# Altium PCB 双闪灯.PcbDoc
Units mm, origin at the board's own origin, x right, y up, seen from the top; angles counter-clockwise.
Board outline 152.4 x 101.6 mm, 2 copper layers (Top Layer, Bottom Layer); 11 components, 8 nets, 24 pads, 4 vias.
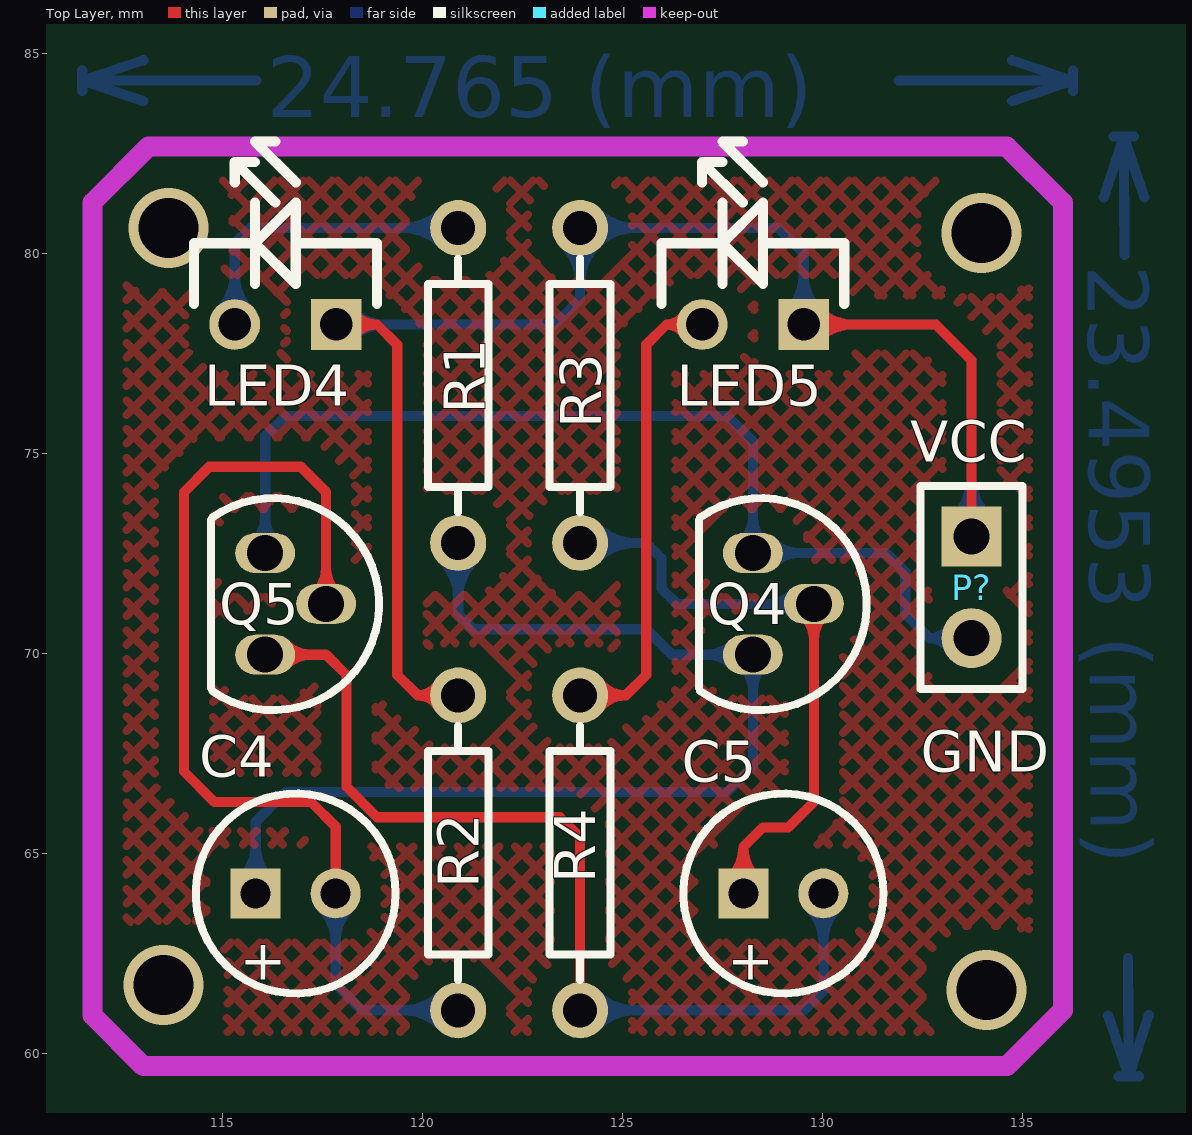
[diagram p0: Top Layer view]
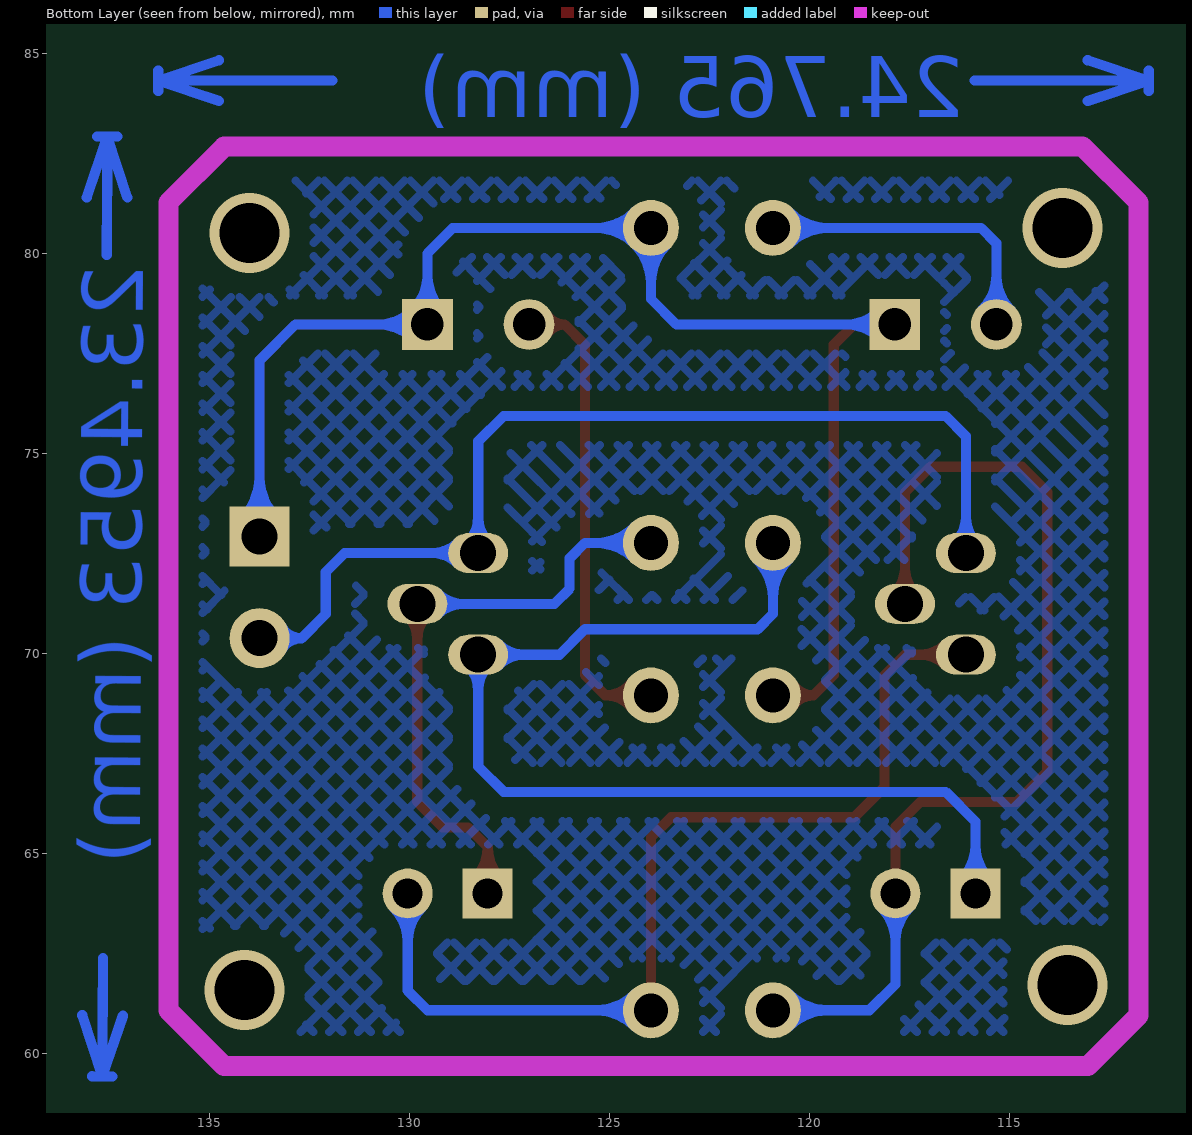
[diagram p1: Bottom Layer view, seen from below]

## Layer stack, top to bottom
Top Layer: signal copper 0.0356
Dielectric: dielectric 0.32, FR-4, Dk 4.8
Bottom Layer: signal copper 0.0356

## Board outline
25.4,25.4 177.8,25.4 177.8,127 25.4,127

## Design rules (kind name [scope] priority, off if disabled: settings)
Clearance [All] p1: gap=0.5
ComponentClearance [All] p1: gap=0.254 collisioncheckmode=3
PolygonConnect [All] p1: connectstyle=Relief reliefconductorwidth=0.254 reliefentries=4 polygonreliefangle="90 Angle"
RoutingVias [All] p1: holewidth=0.711 width=1.27 viastyle="Through Hole" minholewidth=0.711 minwidth=1.27 maxholewidth=0.711 maxwidth=1.27
SolderMaskExpansion [All] p1: expansion=0.102
TestPointUsage [All] p1: valid=0 allowmultiple=FALSE
Testpoint [All] p1: side=15 testpointundercomponent=TRUE minsize=1.016 maxsize=2.54 preferedsize=1.524 minholesize=0 maxholesize=1.016 preferedholesize=0.813 testpointgrid=0.025 style=1023 order=-539222988
Width [All] p1: maxlimit=0.254 minlimit=0.254 preferedwidth=0.254
17 further rules are at their usual default settings.

## Components (designator, comment, footprint, x,y, rotation, side; value= is the part's Value field where it differs from the comment)
C4 "Cap" DJDR_5mm 116.84,64.008 r0 top
C5 "Cap" DJDR_5mm 129.032,64.008 r0 top
LED4 "LED1" LED 115.824,78.74 r0 top
LED5 "LED1" LED 127.508,78.74 r0 top
P? "Header 2" HDR-2 132.588,69.088 r270 top
Q4 "2N3904" SANJG 127,73.66 r180 top
Q5 "2N3904" SANJG 114.808,73.66 r180 top
R1 "Res2" RSE 120.904,76.708 r270 top
R2 "Res2" RSE 120.904,65.024 r270 top
R3 "Res2" RSE 123.952,76.708 r90 top
R4 "Res2" RSE 123.952,65.024 r90 top

## Footprints (in the part's own frame and the unit in brackets; to place one, negate y for a bottom-side part, rotate by r counter-clockwise, add the part's x,y. Pads: shape width x height; smd on the part's side, far side on the other; paste and mask are expansions set on the pad)
DJDR_5mm [mm] "电解电容5mm"
  rect 1.25x1.25 hole 0.75: 1(-1,0)
  round 1.25 hole 0.75: 2(1,0)
  silkscreen extent -2.5,-2.5 2.5,2.5
HDR-2 [mm] "2排针"
  rect 1.5x1.5 hole 0.9: 1(-3.84,1.148)
  round 1.5 hole 0.9: 2(-1.3,1.148)
  silkscreen extent -5.11,-0.12 -0.03,2.42
LED [mil] "发光二极管"
  rect 50x50 hole 32: 1(80,-20)
  round 50 hole 32: 2(-20,-20)
  silkscreen extent -60,0 120,160
RSE [mm] "直插电阻1/8W"
  round 1.4 hole 0.85: 1(-3.937,0) 2(3.937,0)
  silkscreen extent -3.17,-0.76 3.17,0.76
SANJG [mm] "直插三极管"
  oval 1.5x1 hole 0.9: 1(-2.794,2.413) 2(-1.27,1.143) 3(-1.27,3.683)
  silkscreen extent -4.11,-0.23 0.08,5.07

## Part data
C4 C5: "Capacitor"
LED4 LED5: "Typical RED GaAs LED"
P?: "Header, 2-Pin"
Q4 Q5: "NPN General Purpose Amplifier"
R1 R2 R3 R4: "Resistor"

## Via types
v1: diameter 2, hole 1.5, Top Layer to Bottom Layer, 4 vias

## Nets (pads, with @x,y where several pads share a name; then routed paths per layer and width w, separated by ;. In a path a pad name is that pad's centre, name@x,y a point inside that pad or via, vN(x,y) a via of type N, cw(c..) or ccw(c..) an arc to the next point about the centre after c; other vN are vias at no path point)
GND: P?.2 Q4.2 Q5.2 | length 30.8
  Bottom Layer w0.254: Q5.2@115.814,72.781 ccw(c115.178,73.417) 116.078,73.417 ccw(c116.978,73.417) Q5.2@116.342,72.781 ; Q5.2 116.078,75.438 116.586,75.946 127.635,75.946 128.27,75.311 Q4.2 131.607,72.517 132.08,72.044 132.08,70.993 132.685,70.388 ; Q4.2@128.006,72.781 ccw(c127.37,73.417) 128.27,73.417 ccw(c129.17,73.417) Q4.2@128.534,72.781 ; Q4.2@128.784,72.253 cw(c129.42,71.617) 129.42,72.517 cw(c129.42,73.417) Q4.2@128.784,72.781 ; P?.2@133.189,70.089 ccw(c132.685,69.813) 132.685,70.388 ; P?.2@133.189,70.687 cw(c132.685,70.963) 132.685,70.388 ; P?.2 132.685,70.388
NetC4_1: C4.1 Q4.3 R1.2 | length 35.3
  Bottom Layer w0.254: C4.1@115.488,64.36 ccw(c114.638,65.21) 115.84,65.21 ccw(c117.042,65.21) C4.1@116.192,64.36 ; C4.1 115.84,65.802 116.586,66.548 127.635,66.548 128.27,67.183 Q4.3 126.238,69.977 125.603,70.612 121.285,70.612 120.904,70.993 R1.2 ; R1.2@120.499,72.366 cw(c119.521,71.388) 120.904,71.388 cw(c122.287,71.388) R1.2@121.309,72.366 ; R1.2@120.678,72.545 cw(c120.134,72.001) 120.904,72.001 cw(c121.674,72.001) R1.2@121.13,72.545 ; Q4.3@127.756,69.713 ccw(c127.12,69.077) 127.12,69.977 ccw(c127.12,70.877) Q4.3@127.756,70.241 ; Q4.3@128.006,69.713 cw(c127.37,69.077) 128.27,69.077 cw(c129.17,69.077) Q4.3@128.534,69.713
NetC4_2: C4.2 Q5.1 R2.2 | length 32.2
  Top Layer w0.254: Q5.1@117.338,71.511 ccw(c116.702,72.147) 117.602,72.147 ccw(c118.502,72.147) Q5.1@117.866,71.511 ; Q5.1 117.602,74.041 116.967,74.676 114.681,74.676 114.046,74.041 114.046,67.056 114.808,66.294 117.221,66.294 117.84,65.675 C4.2
  Bottom Layer w0.254: C4.2@117.488,63.656 cw(c116.638,62.806) 117.84,62.806 cw(c119.042,62.806) C4.2@118.192,63.656 ; C4.2 117.84,61.738 118.491,61.087 R2.2 ; R2.2@120.499,60.682 ccw(c119.521,59.704) 119.521,61.087 ccw(c119.521,62.47) R2.2@120.499,61.492 ; R2.2@120.678,60.861 ccw(c120.134,60.317) 120.134,61.087 ccw(c120.134,61.857) R2.2@120.678,61.313
NetC5_1: C5.1 Q4.1 R3.1 | length 23.3
  Top Layer w0.254: C5.1@127.689,64.369 ccw(c126.932,65.167) 128.032,65.167 ; C5.1 128.032,65.167 ; C5.1@128.375,64.369 cw(c129.132,65.167) 128.032,65.167 ; Q4.1@129.53,70.983 cw(c128.894,70.347) 129.794,70.347 cw(c130.694,70.347) Q4.1@130.058,70.983 ; Q4.1 129.794,66.294 129.159,65.659 128.524,65.659 128.032,65.167
  Bottom Layer w0.254: R3.1 125.603,72.771 125.984,72.39 125.984,71.628 126.365,71.247 Q4.1 ; R3.1@124.178,72.545 cw(c124.722,72.001) 124.722,72.771 cw(c124.722,73.541) R3.1@124.178,72.997 ; R3.1@124.357,72.366 cw(c125.335,71.388) 125.335,72.771 cw(c125.335,74.154) R3.1@124.357,73.176 ; Q4.1@129.28,70.983 ccw(c128.644,70.347) 128.644,71.247 ccw(c128.644,72.147) Q4.1@129.28,71.511
NetC5_2: C5.2 Q5.3 R4.1 | length 31.1
  Top Layer w0.254: Q5.3 117.602,69.977 118.11,69.469 118.11,66.675 118.872,65.913 123.444,65.913 123.952,65.405 R4.1 ; Q5.3@116.592,69.713 cw(c117.228,69.077) 117.228,69.977 cw(c117.228,70.877) Q5.3@116.592,70.241
  Bottom Layer w0.254: R4.1 129.54,61.087 130.032,61.579 C5.2 ; R4.1@124.178,60.861 cw(c124.722,60.317) 124.722,61.087 cw(c124.722,61.857) R4.1@124.178,61.313 ; R4.1@124.357,60.682 cw(c125.335,59.704) 125.335,61.087 cw(c125.335,62.47) R4.1@124.357,61.492 ; C5.2@129.68,63.656 cw(c128.83,62.806) 130.032,62.806 cw(c131.234,62.806) C5.2@130.384,63.656
NetLED4_2: LED4.2 R1.1 | length 13.1
  Bottom Layer w0.254: LED4.2@114.957,78.591 ccw(c114.09,79.458) 115.316,79.458 ccw(c116.542,79.458) LED4.2@115.675,78.591 ; LED4.2 115.316,80.264 115.697,80.645 R1.1 ; R1.1@120.499,80.24 ccw(c119.521,79.262) 119.521,80.645 ccw(c119.521,82.028) R1.1@120.499,81.05 ; R1.1@120.678,80.419 ccw(c120.134,79.875) 120.134,80.645 ccw(c120.134,81.415) R1.1@120.678,80.871
NetLED5_2: LED5.2 R4.2 | length 14.4
  Top Layer w0.254: R4.2 125.095,68.961 ; R4.2@124.411,68.618 cw(c125.095,68.108) 125.095,68.961 ; R4.2@124.411,69.304 ccw(c125.095,69.814) 125.095,68.961 ; LED5.2@126.562,77.974 ccw(c126.111,77.708) 126.111,78.232 ; LED5.2@126.562,78.49 cw(c126.111,78.756) 126.111,78.232 ; LED5.2 126.111,78.232 ; 125.095,68.961 125.603,69.469 125.603,77.724 126.111,78.232
VCC: LED4.1 LED5.1 P?.1 R2.1 R3.2 | length 66.4
  Top Layer w0.254: LED4.1 118.872,78.232 ; LED4.1@118.262,77.927 cw(c118.872,77.47) 118.872,78.232 ; LED4.1@118.262,78.537 ccw(c118.872,78.994) 118.872,78.232 ; R2.1@120.414,68.665 ccw(c119.888,68.347) 119.888,68.961 ; R2.1@120.414,69.257 cw(c119.888,69.575) 119.888,68.961 ; R2.1 119.888,68.961 ; LED5.1 132.842,78.232 133.736,77.338 P?.1 ; LED5.1@129.899,77.873 cw(c130.766,77.006) 130.766,78.232 cw(c130.766,79.458) LED5.1@129.899,78.591 ; 118.872,78.232 119.38,77.724 119.38,69.469 119.888,68.961
  Bottom Layer w0.254: LED4.1 123.317,78.232 123.952,78.867 R3.2 128.905,80.645 129.54,80.01 LED5.1 132.842,78.232 133.736,77.338 P?.1 ; LED4.1@118.215,77.873 cw(c119.082,77.006) 119.082,78.232 cw(c119.082,79.458) LED4.1@118.215,78.591 ; R3.2@123.547,80.24 cw(c122.569,79.262) 123.952,79.262 cw(c125.335,79.262) 124.357,80.24 cw(c125.335,79.262) 125.335,80.645 cw(c125.335,82.028) R3.2@124.357,81.05 ; R3.2@123.726,80.419 cw(c123.182,79.875) 123.952,79.875 cw(c124.722,79.875) 124.178,80.419 cw(c124.722,79.875) 124.722,80.645 cw(c124.722,81.415) R3.2@124.178,80.871 ; LED5.1@129.181,78.591 ccw(c128.314,79.458) 129.54,79.458 ccw(c130.766,79.458) 129.899,78.591 ccw(c130.766,79.458) 130.766,78.232 ccw(c130.766,77.006) LED5.1@129.899,77.873 ; P?.1@133.295,73.369 ccw(c132.232,74.432) 133.736,74.432 ccw(c135.24,74.432) P?.1@134.177,73.369 ; P?.1@133.475,73.189 ccw(c132.845,73.819) 133.736,73.819 ccw(c134.627,73.819) P?.1@133.997,73.189
copper on no net: | length 29.5
  Bottom Layer w0.254: 111.506,84.074 111.506,84.582 ; 113.03,83.82 111.506,84.328 ; 113.03,84.836 111.506,84.328 ; 115.865,84.328 111.506,84.328 ; 131.912,84.328 136.271,84.328 ; 134.747,83.82 136.271,84.328 ; 134.747,84.836 136.271,84.328 ; 136.271,84.074 136.271,84.582 ; 137.041,81.404 137.541,82.931 ; 137.152,60.957 137.668,59.436 ; 137.287,82.93 137.795,82.932 ; 137.414,59.435 137.922,59.437 ; 137.557,79.969 137.541,82.931 ; 137.652,62.398 137.668,59.436 ; 138.057,81.41 137.541,82.931 ; 138.168,60.963 137.668,59.436
  other v1: 134.112,61.595 113.538,61.722 133.985,80.518 113.665,80.645

## Polygon pours and split planes (outlines as drawn)
no net on Top Layer (hatched 45Degree grid 0.508 track 0.203): 121.158,82.296 113.411,82.296 112.141,81.026 112.141,61.341 113.157,60.325 134.366,60.325 135.509,61.468 135.509,80.899 134.239,82.169 120.523,82.169 120.523,82.423
no net on Bottom Layer (hatched 45Degree grid 0.508 track 0.203): 123.698,82.296 113.284,82.296 112.141,81.153 112.141,61.214 113.03,60.325 134.366,60.325 135.509,61.468 135.509,80.899 134.239,82.169 123.444,82.169 123.444,82.296

## Keep-outs
Keep-Out Layer:
  lines w0.5: 111.76,63.5 111.76,81.28 ; 111.76,68.326 111.76,81.28 ; 111.76,73.66 111.76,60.96 113.03,59.69 134.62,59.69 136.017,61.087 136.017,81.28 134.62,82.677 113.157,82.677 ; 134.493,82.677 113.157,82.677 ; 111.76,81.28 113.157,82.677 ; 111.76,81.28 113.157,82.677

## Other copper
Bottom Layer:
  text "24.765 (mm)" at 116.119,83.414 h1.52
  text "23.4953 (mm)" at 136.644,79.71 h1.52 r270.31

## Silkscreen, mask and mechanical layers (free items; w line width, h text height)
Top Overlay:
  text "VCC" at 132.207,74.803 h1.02
  text "GND" at 132.461,67.056 h1.02
Mechanical 1:
  lines w0.5: 111.76,63.373 111.76,81.28 113.157,82.677 134.493,82.677 ; 111.76,71.12 111.76,60.96 ; 111.76,77.851 111.76,60.96 ; 111.76,60.96 113.03,59.69 ; 111.76,60.96 113.03,59.69 ; 113.03,59.69 134.62,59.69 ; 113.03,59.69 134.62,59.69 ; 134.493,82.677 136.017,81.153 ; 134.493,82.677 136.017,81.153 ; 134.62,59.69 136.017,61.087 ; 134.62,59.69 136.017,61.087 ; 136.017,61.087 136.017,81.153 ; 136.017,61.087 136.017,81.153

## Text inside footprints (layer, text, board x,y; h text height)
C4: Top Overlay "+" at 115.443,61.849 h1.02
C5: Top Overlay "+" at 127.635,61.849 h1.02